# EAGLE board Width_testboard (EAGLE 9.5.1)
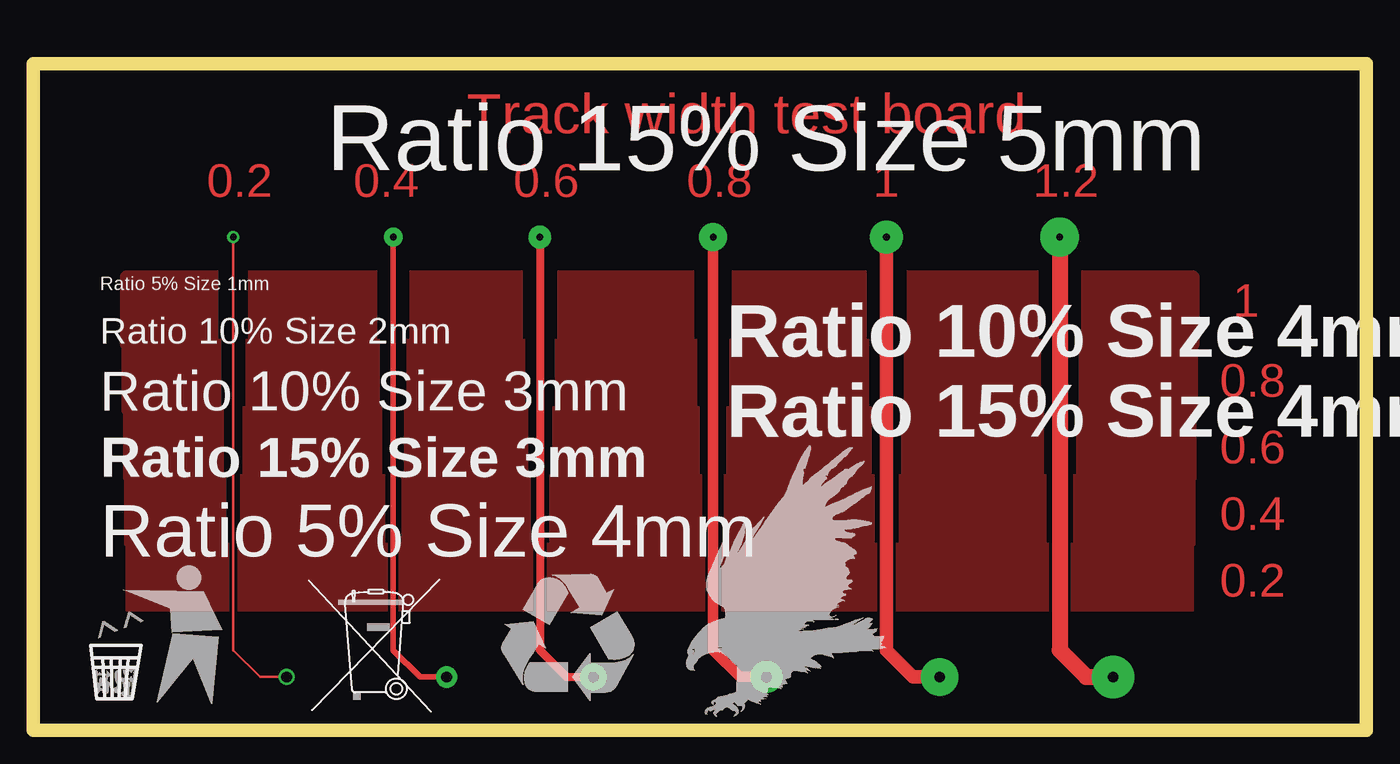
[diagram p0: board, top side]

Size 100 x 50 mm. Coordinates in mm from the lower left corner, seen from the top.
Outline: 0,0 0,50 100,50 100,0 0,0
Copper layers (1*16): Top 0.035mm / dielectric 1.5mm / Bottom 0.035mm
Design rules "default": minimum track width 6mil, minimum drill 0.35mm, track to track 6mil, track to pad 6mil, pad to pad 6mil, via to via 6mil, smd to smd 6mil, copper to edge 40mil, drill to drill 6mil, minimum pad ring 10mil, minimum via ring 8mil, stop-mask expansion 4mil, vias tented up to drill 0mil, thermal gap 10mil

## Placement (x,y rotation side)
E$1  [EAGLE-PLC-15MM]  49,1 0 top
E$2  [MUELLEIMER_10.00]  4,2 0 top
E$3  [MUELLTONNE_10.00]  20,1 0 top
E$4  [RECYCLING_10.00]  35,2 0 top

## Library data of the parts
E$1-E$4 = logo

## Tracks (layer width: path | path; a pad name or v marks a point on that pad's centre or on a via)
S$1  (via drill 0.5 pad 0.9, 0.8 pad 1.2)
  Top 0.2: v15,37 15,6 17,4 v19,4
S$2  (via drill 0.5 pad 1.4, 0.8 pad 1.6)
  Top 0.4: v27,37 27,6 29,4 v31,4
S$3  (via drill 0.5 pad 1.7, 0.8 pad 2)
  Top 0.6: v38,37 38,6 40,4 v42,4
S$4  (via drill 0.5 pad 2.1)
  Top 0.8: v51,37 51,6 53,4 55,4
S$5  (via drill 0.5 pad 2.5)
  Top 1: v64,37 64,6 66,4 68,4
S$6  (via drill 0.5 pad 2.9)
  Top 1.2: v77,37 77,6 79,4 81,4
S$7  (via drill 0.8 pad 2.4)
  other vias: 55,4
S$8  (via drill 0.8 pad 2.8)
  other vias: 68,4
S$9  (via drill 0.8 pad 3.2)
  other vias: 81,4
TEST1
  pour Top (isolate 0.2): 7,9 87,9 87,14 7,14
TEST2
  pour Top (isolate 0.4): 7,14 87,14 87,19 7,19
TEST3
  pour Top (isolate 0.6): 7,19 87,19 87,24 7,24
TEST4
  pour Top (isolate 0.8): 7,24 87,24 87,29 7,29
TEST5
  pour Top (isolate 1): 7,29 87,29 87,34 7,34

## Text on the board
Top: Track width test board | 0.2 | 0.4 | 0.6 | 0.8 | 1 | 1.2 | 1 | 0.8 | 0.6 | 0.4 | 0.2
tNames: Ratio 15% Size 5mm | Ratio 5% Size 1mm | Ratio 10% Size 2mm | Ratio 10% Size 4mm | Ratio 10% Size 3mm | Ratio 15% Size 4mm | Ratio 15% Size 3mm | Ratio 5% Size 4mm